# Altium PCB CellVoltageControl.PcbDoc (part 2 of 3)
Units mm, origin at the board's own origin, x right, y up, seen from the top; angles counter-clockwise.
Board outline 100.01 x 50.02 mm, 2 copper layers (Top Layer, Bottom Layer); 246 components, 111 nets, 654 pads, 146 vias.
Unrouted connection lines stored in the file: 464.
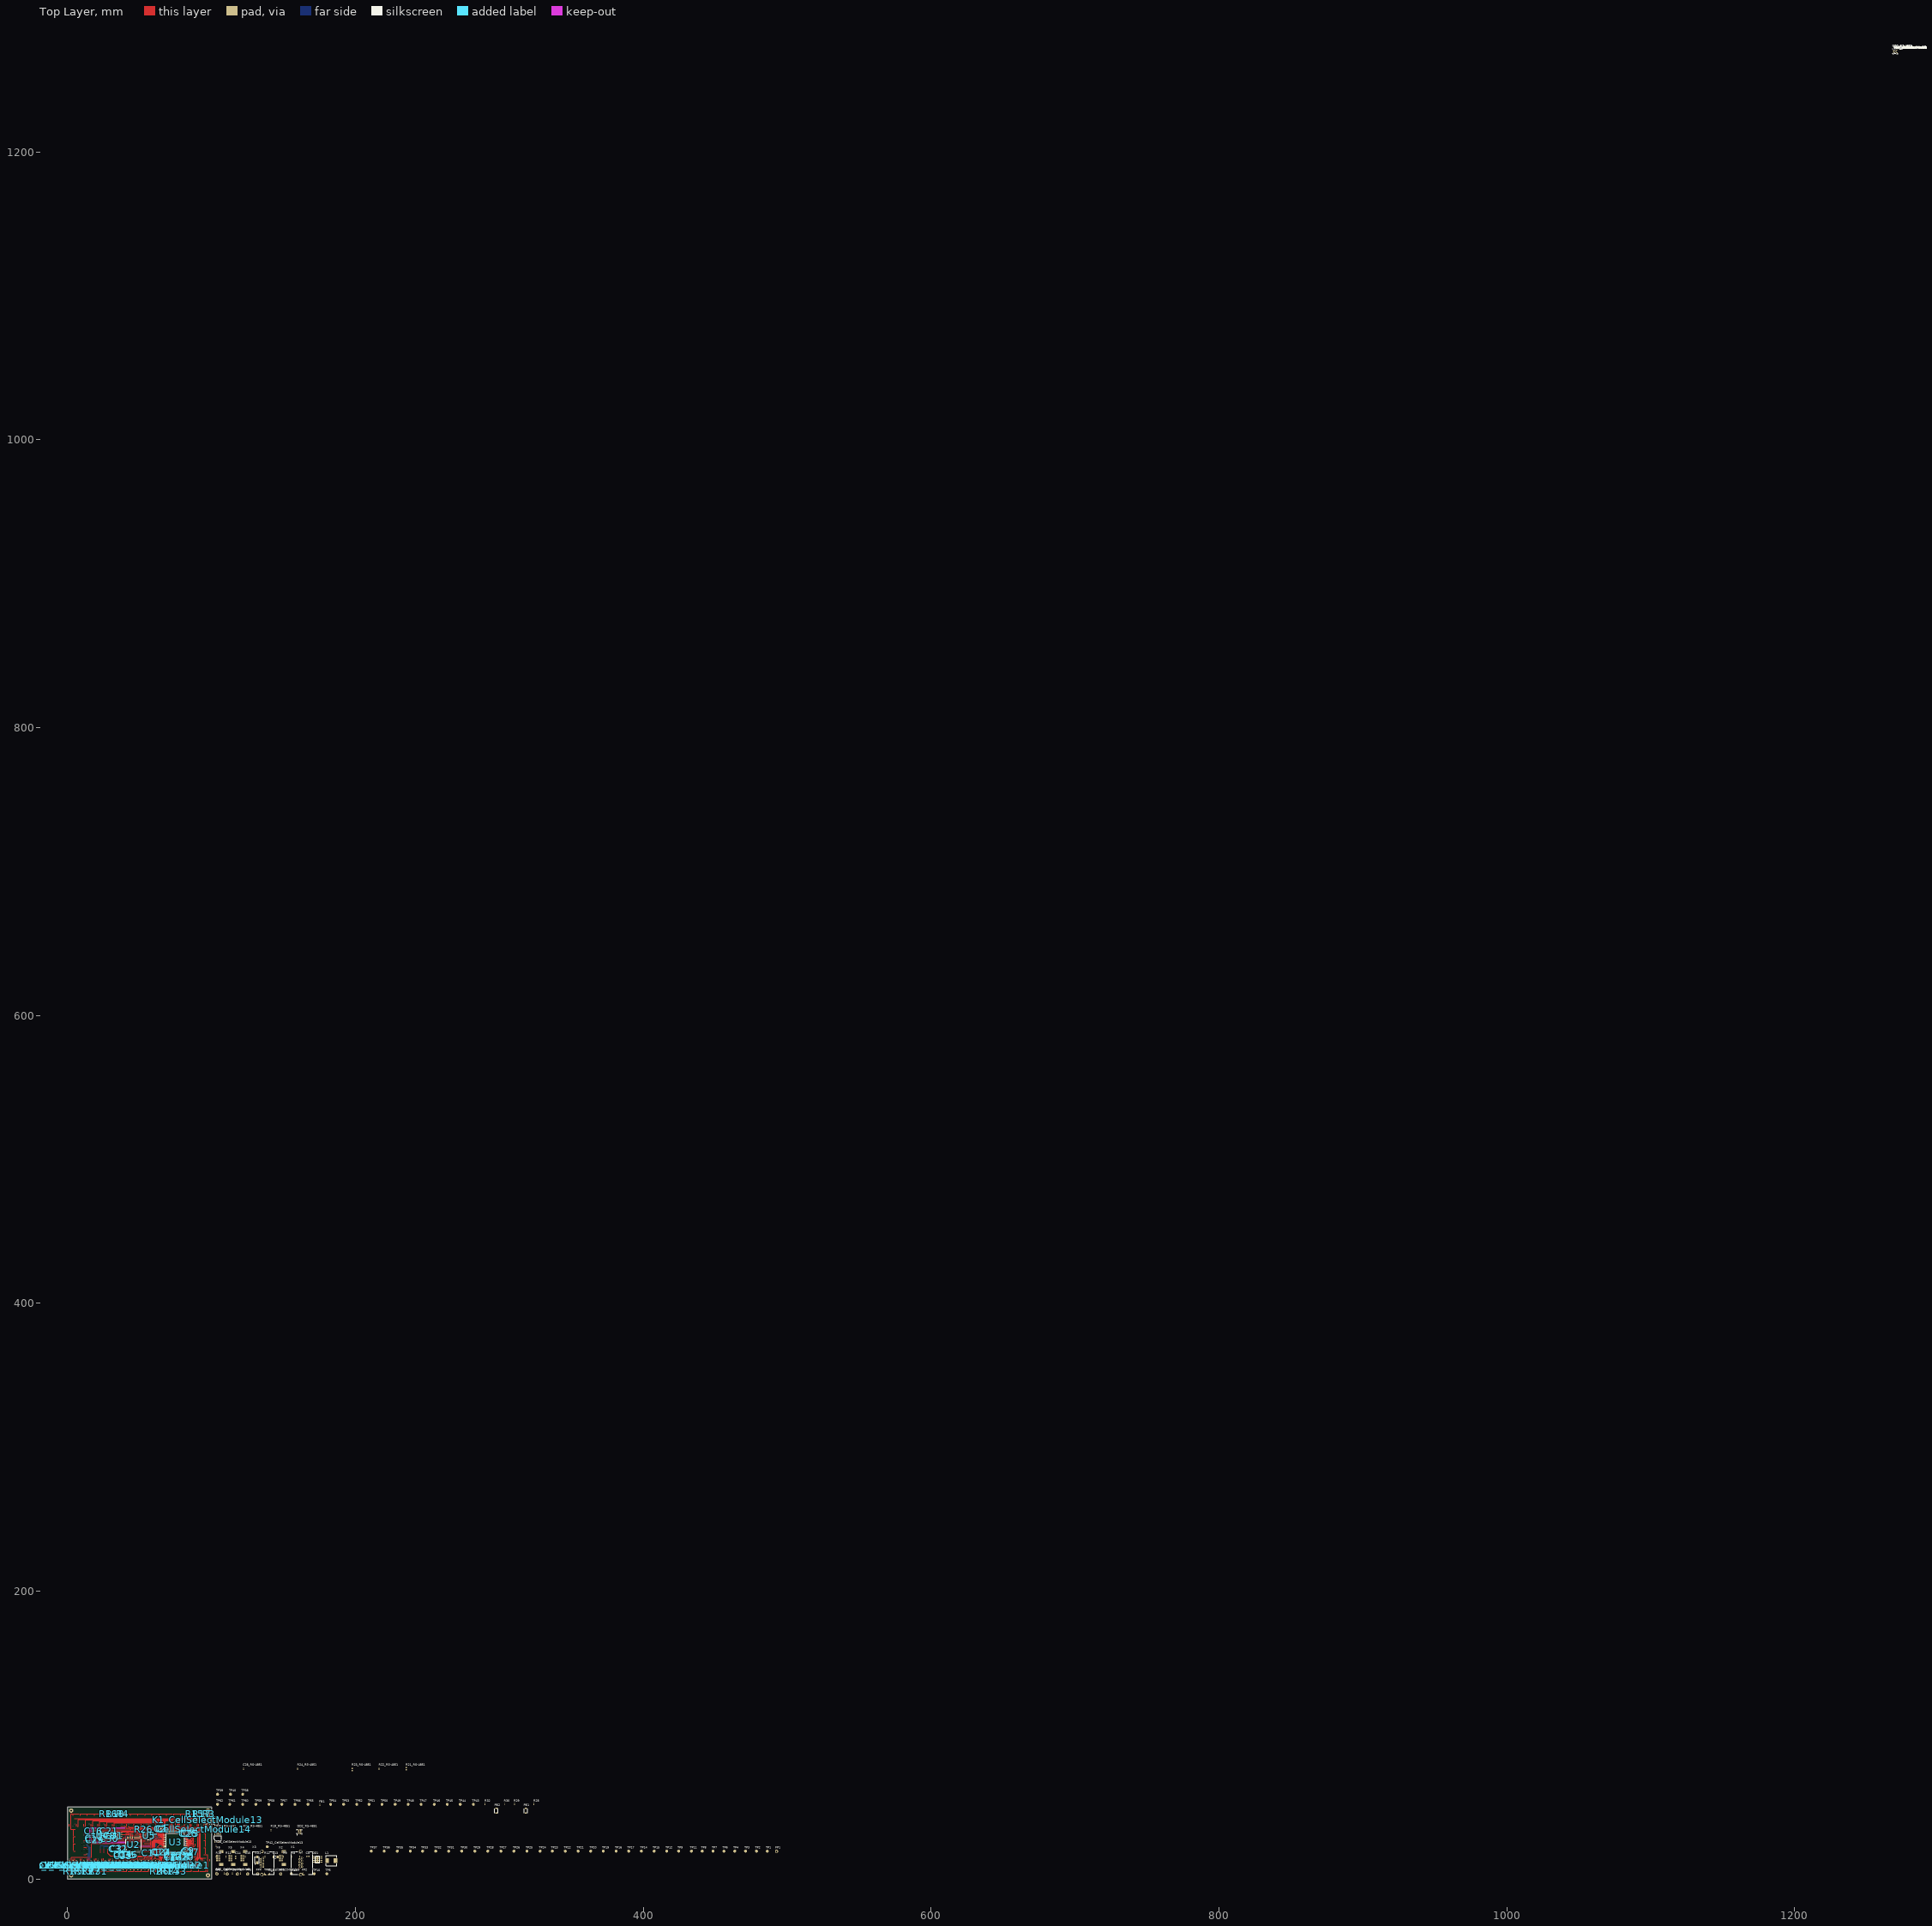
[diagram p0: Top Layer view]

## Part data (continued)
R21_RS-4851 R21_RS-4852 R21_RS-4853 R23_RS-4851 R23_RS-4852 R23_RS-4853: library part RC0603JR-0710RL, "10 Ohms ±5%, 1/10W 0603 Thick Film Resistor", Manufacturer=Yageo, Package=0603, Power Rating=0.1W, Supplier Part Number 1=603-RC0603JR-0710RL, Temperature Range="-55°C ~ 155°C", Temperature Stability=±200ppm/°C, Tolerance=±5%, Voltage=75V, Component Status=Released, Component Type=SMD, ComponentLink1Description=Datasheet, ComponentLink1URL=https://eu.mouser.com/datasheet/2/447/Yageo_03_18_2021_PYu_RC_Group_51_RoHS_L_11-2199992.pdf, Part Number=RC0603JR-0710RL, Part Type="Thick Film", Price=0.0006, Replacement=NONE, Supplier 1=Mouser
R26_CellSelectModule1 R26_CellSelectModule2 R26_CellSelectModule3 R26_CellSelectModule4 R26_CellSelectModule5 R26_CellSelectModule6 R26_CellSelectModule7 R26_CellSelectModule8 R26_CellSelectModule9 R26_CellSelectModule10 R26_CellSelectModule11 R26_CellSelectModule12 R26_CellSelectModule13 R26_CellSelectModule14: library part RC0402FR-07430RL, "430 Ohms ±1% 1/16W 0402 Thick Film Resistor", Manufacturer=Yageo, Package=0402, Power Rating=0.062W, Supplier Part Number 1=311-430LRTR-ND, Temperature Range="-55°C ~ 155°C", Temperature Stability=±100ppm/°C, Tolerance=±1%, Voltage=50V, Component Status=Released, Component Type=SMD, ComponentLink1Description=Datasheet, ComponentLink1URL=https://eu.mouser.com/datasheet/2/447/PYu_RC_Group_51_RoHS_L_11-1984063.pdf, Part Number=RC0402FR-07430RL, Part Type="Thick Film", Price=0.00065, Replacement=NONE, Supplier 1=Digi-Key
R28 R29 R30 R32 R33: library part RC0402JR-070RL, "0 Ohms Jumper ±5% 1/16W 0402 Thick Film Resistor", Manufacturer=Yageo, Package=0402, Power Rating=0.062W, Supplier Part Number 1=311-0.0JRTR-ND, Temperature Range="-55°C ~ 155°C", Temperature Stability=NONE, Tolerance=±5%, Voltage=50V, Component Status=Released, Component Type=SMD, ComponentLink1Description=Datasheet, ComponentLink1URL=https://eu.mouser.com/datasheet/2/447/PYu_RC_Group_51_RoHS_L_10-1664068.pdf, Part Number=RC0402JR-070RL, Part Type="Thick Film", Price=0.00045, Replacement=NONE, Supplier 1=Digi-Key
TP1 TP2 TP3 TP4 TP5 TP6 TP7 TP8 TP9 TP10 TP11 TP12 TP13 TP14 TP15 TP16 TP17 TP18 TP19 TP20 TP21 TP22 TP23 TP24 TP25 TP26 TP27 TP28 TP29 TP30 TP31 TP32 TP33 TP34 TP35 TP36 TP37 TP38 TP39 TP40 TP41_CellSelectModule1 TP41_CellSelectModule2 TP41_CellSelectModule3 TP41_CellSelectModule4 TP41_CellSelectModule5 TP41_CellSelectModule6 TP41_CellSelectModule7 TP41_CellSelectModule8 TP41_CellSelectModule9 TP41_CellSelectModule10 TP41_CellSelectModule11 TP41_CellSelectModule12 TP41_CellSelectModule13 TP41_CellSelectModule14 TP42_CellSelectModule1 TP42_CellSelectModule2 TP42_CellSelectModule3 TP42_CellSelectModule4 TP42_CellSelectModule5 TP42_CellSelectModule6 TP42_CellSelectModule7 TP42_CellSelectModule8 TP42_CellSelectModule9 TP42_CellSelectModule10 TP42_CellSelectModule11 TP42_CellSelectModule12 TP42_CellSelectModule13 TP42_CellSelectModule14 TP43 TP44 TP45 TP46 TP47 TP48 TP49 TP50 TP51 TP52 TP53 TP54 TP55 TP56 TP57 TP58 TP59 TP60 TP61 TP62: library part TP-PAD-SMD, "Test Point SMD Pad 1.0mm/1.5mm/2mm", Temperature Range=NONE, Component Type=SMD, ComponentLink1Description=Datasheet, ComponentLink1URL=NONE, Part Number=TP-PAD-SMD, Part Type="Test Point", Replacement=NONE
U1: library part CMP-0003-00072-2, "ResolutionPlus 24-Bit, 40 kHz ADC, -40 to 85 degC, 8-pin SOIC (D8), Green (RoHS & no Sb/Br)", Analog Voltage AV/DD(Max)(V)=5.25, Analog Voltage AV/DD(Min)(V)=4.75, Manufacturer="Texas Instruments", # Input Channels=1, Architecture=Delta-Sigma, Code_JEDEC=MS-012, ComponentLink1Description="Manufacturer URL", ComponentLink1URL=http://www.ti.com/, ComponentLink2Description=Datasheet, ComponentLink2URL=http://www.ti.com/general/docs/lit/getliterature.tsp?genericPartNumber=ADS1252&fileType=pdf, ComponentLink3Description="Package Specification", ComponentLink3URL=http://www.ti.com/litv/pdf/msoi002j, DatasheetVersion=SBAS127D, Digital Supply(Max)(V)=5.25, Digital Supply(Min)(V)=4.75, Eco-Plan="Green (RoHS & no Sb/Br)", INL(Max)(+/-LSB)=1, Interface="Serial SPI", Mounting Technology="Surface Mount", PackageDescription="8-Pin Plastic Small Outline, Body 4.9 x 3.9 mm, Pitch 1.27 mm", PackageReference=D8, PackageVersion="4040047-3/M, 06/2011", PartNumber=ADS1252U, Resolution(Bits)=24, Sample Rate (max)(SPS)=41k, SubFamily="Precision ADC (<=10MSPS)"
U2: library part CMP-04910-000064-1, "DC DC CONVERTER 3.3V 5V 500MW"
U3: library part CMP-0271-00145-3, "High-Speed, Single-Supply, Rail-to-Rail Operational Amplifier MicroAmplifier(TM) Series, 2.7 to 5.5 V, -40 to 85 degC, 8-pin SOIC (D8), Green (RoHS & no Sb/Br)", Manufacturer="Texas Instruments", Total Supply Voltage(Max)(+5V is 5, +/-5V is 10)=5.5, Total Supply Voltage(Min)(+5V is 5, +/-5V is 10)=2.7, CMRR(Min)(dB)=66, Code_JEDEC=MS-012, ComponentLink1Description="Manufacturer URL", ComponentLink1URL=http://www.ti.com/, ComponentLink2Description=Datasheet, ComponentLink2URL=http://www.ti.com/general/docs/lit/getliterature.tsp?genericPartNumber=OPA350&fileType=pdf, ComponentLink3Description="Package Specification", ComponentLink3URL=http://www.ti.com/litv/pdf/msoi002j, DatasheetVersion=SBOS099C, Eco-Plan="Green (RoHS & no Sb/Br)", IIB(Max)(pA)=10, Iq per channel(Max)(mA)=8.5, Mounting Technology="Surface Mount", Number of Channels=1, Offset Drift(Typ)(uV/C)=4, PackageDescription="8-Pin Plastic Small Outline, Body 4.9 x 3.9 mm, Pitch 1.27 mm", PackageReference=D0008A, PackageVersion="4040047-3/M, 06/2011", PartNumber=OPA350UA, Slew Rate(Typ)(V/us)=22, Sub Family="Low Input Bias Current Amp (<=10pA), Low Offset Voltage Amplifier (<=500uV), Low Supply Voltage Amplifier (<=2.7V), Precision Amplifier", Vio (25C)(Max)(mV)=1, Vn at 1kHz(Typ)(nV/rtHz)=18
U4: library part CMP-0074-00531-5, "IC VREF SERIES 0.05% SOT23-5", Case/Package=SOT-23, Dropout Voltage=175mV, Max Input Voltage=6V, Max Operating Temperature=125°C, Max Output Current=20mA, Max Output Voltage=2.5V, Max Supply Voltage=2.2V, Min Operating Temperature=-40°C, Nominal Supply Current=60uA, Operating Supply Current=100uA, Package Quantity=1000, Temperature Coefficient=20ppm/°C, Tolerance=0.05%, Height=1.02mm, Lead Free="Lead Free", Length=2.92mm, Min Input Voltage=2.2V, Min Output Voltage=2.5V, Mount="Surface Mount", Number of Channels=1, Number of Pins=5, Output Current=20mA, Output Type=Fixed, Output Voltage=2.5V, Packaging="Tape and Reel", Quiescent Current=100uA, Radiation Hardening=No, REACH SVHC="No SVHC", Reference Type=Series, Reference Voltage=2.5V, Series=-, Supply Current=60uA, Termination=SMD/SMT, Width=1.6mm
U5: library part CMP-12105-000001-1, "16/32-BITS MICROS", Ambient Temperature Range High=+85°C, Ambient Temperature Range Low=-40°C, Frequency=32MHz, Manufacturer=STMicroelectronics, Max Junction Temp=+105°C, Max Supply Voltage=3.6V, Min Supply Voltage=1.8V, Nominal Supply Current=22-5400uA, Package=LQFP32-5V, Temperature="-40°C to +85°C", Automotive=No, Category=IC, ComponentLink2Description=Datasheet, ComponentLink2URL=https://www.st.com/resource/en/datasheet/stm32l010f4.pdf, Core Architecture="ARM Cortex-M0+", Data Bus Width=32bits, Device Class L1="Integrated Circuits (ICs)", Device Class L2="Embedded Processors and Controllers", Device Class L3=Microcontrollers, Digikey Description="16/32-BITS MICROS", Height=1.6mm, Interface=I2C,SPI,UART,USART,SMBus, Lead Free=Yes, Manufacturer Part Number=STM32L010K4T6, Memory Size=16KBytes, Memory Type=FLASH, Number Of A/D Converters=1, Number Of Adc Channels=10, Number Of Cores=1, Number Of I2C Channels=1, Number Of I/Os=26, Number Of Spi Channels=1, Number Of Timers/Counters=5, Number Of Uart Channels=2, Octopart=https://octopart.com/stm32l010k4t6-stmicroelectronics-96493833, Ram Size=2KBytes, RoHS=TRUE, Standoff Height=0.05mm, Temperature Range High=+85°C, Temperature Range Low=-40°C
VD1: "Diode Schottky 60V 5A, SMA", Current=5A, Manufacturer="Micro Commercial Components", Package=SMA, Supplier Part Number 1=SK56A-LTPMSTR-ND, Temperature Range="-55°C ~ 150°C", Voltage=60V, Component Status=Released, Component Type=SMD, ComponentLink1Description=Datasheet, ComponentLink1URL=\\altiumdb.ajax.local\files\Datasheet\Diodes\SK52A-L-SK510A-L(DO-214AC).pdf, Marking=SK56A, Part Number=SK56A-LTP, Part Type=Schottky, Price=0.06, Replacement=NONE, Standard Lead Time="12 Weeks", Supplier 1=Digi-Key, Vf="750mV @ 5A"
VD2_RS-4851 VD2_RS-4852 VD2_RS-4853: "TVS Diode 26V and 19V Clamp, 21A and 38A (8/20us) Ipp, SOT-23", Current="21A, 38A", Manufacturer=Semtech, Package=SOT-23, Supplier Part Number 1=SM712TR-ND, Temperature Range="-55°C ~ 125°C", Voltage="13.3V, 7.5V", Component Status=Released, Component Type=SMD, ComponentLink1Description=Datasheet, ComponentLink1URL=https://semtech.my.salesforce.com/sfc/p/#E0000000JelG/a/440000001MKW/f6pBKheIN2CeR0DxWdS3THuJ7nh4aKYltSzghsLP5iw, Marking=712, Part Number=SM712.TCT, Part Type="TVS / ESD Protection", Price=0,25, Replacement=NONE, Standard Lead Time="2 Weeks", Supplier 1=Digi-Key
X1 X3: "RJ45 8P8C Shielded Cat 3 10 Base-T Connector", Manufacturer=Molex, Supplier Part Number 1=538-43860-0004, Temperature Range="-40°C ~ 85°C", Component Status=Released, Component Type=PTH, ComponentLink1Description=Datasheet, ComponentLink1URL=https://www.molex.com/pdm_docs/sd/438600004_sd.pdf, Part Number=43860-0004, Part Type=RJ-45, Price=2.1435, Replacement=NONE, Supplier 1=Mouser
X2 X4 X5 X6: "1.25mm Wire-to-Board Header, Vertical, SMT, 4 pin", Manufacturer="Hsuan Mao Technology", Temperature Range="-40°C ~ 85°C", Component Status=Released, Component Type=SMD, Part Number=W1359-04PATRI0R, Part Type="Wire-to-Board / 1.25mm", Price=0.06, Replacement=53398-0471
Y1: library part CMP-40224-000008-1, "XTAL OSC TCXO 16MHZ 3.3V SMD", Frequency=16MHz, Load Capacitance=15pF, Manufacturer=ECS, Max Supply Current=7mA, Max Supply Voltage=3.63V, Min Supply Voltage=2.97V, Package=TXO-2016, Temperature="-40°C to +85°C", Temperature Range High=+85°C, Temperature Range Low=-40°C, Automotive=No, Category=Crys, ComponentLink2Description=Datasheet, ComponentLink2URL=https://ecsxtal.com/store/pdf/ECS-TXO-2016.pdf, Device Class L1="Passive Components", Device Class L2="Crystals / Oscillators", Device Class L3=Oscillators, Digikey Description="XTAL OSC TCXO 16MHZ 3.3V SMD", Height=0.8mm, Lead Free=Yes, Manufacturer Part Number=ECS-TXO-2016-33-160-TR, Octopart=https://octopart.com/ecs-txo-2016-33-160-tr-ecs+international-102811109, RoHS=TRUE, Series=TXO-2016, Stability=2ppm
Y2: library part CMP-25159-260295-1, "MEMS OSC TCXO 32.7680KHZ LVCMOS", Frequency=32.768kHz, Frequency Stability=5ppm, Max Operating Temperature=70°C, Min Operating Temperature=0°C, Height=0.024inch, Length=0.061inch, Mount="Surface Mount", Packaging="Cut Tape", RoHS Compliant=Yes, Series=SiT1552, Width=0.033inch

## Free pads (board coordinates)
  round 3 hole 1.15: 2(2.5,2.5) 2(2.5,47.5) 2(97.5,2.5) 2(97.5,47.5)

## Via types
v1: diameter 0.61, hole 0.305, Top Layer to Bottom Layer, tented both sides, 128 vias
v2: diameter 0.6, hole 0.3, Top Layer to Bottom Layer, 18 vias

## Nets (pads, with @x,y where several pads share a name; then routed paths per layer and width w, separated by ;. In a path a pad name is that pad's centre, name@x,y a point inside that pad or via, vN(x,y) a via of type N, cw(c..) or ccw(c..) an arc to the next point about the centre after c; other vN are vias at no path point)
3V3: C6.1 C7.1 C16.1 C28_RS-4851.1 C28_RS-4852.1 C28_RS-4853.1 D1.5 D2.2 DD2_RS-4851.8 DD2_RS-4852.8 DD2_RS-4853.8 FP1.1 R13.1 R15.1 R19_RS-4851.1 R19_RS-4852.1 R19_RS-4853.1 R20_RS-4851.1 R20_RS-4852.1 R20_RS-4853.1 R27.1 R28.2 R29.2 R31.1 TP5.1 X2.1 X4.1 Y1.1 Y1.4 Y2.3 | length 5.5
  Top Layer w0.2: 83.72,44.021 83.72,45.15 R15.1@88.07,45.15